# Altium PCB Siwa_PCB.PcbDoc (part 2 of 2)
Units mm, origin at the board's own origin, x right, y up, seen from the top; angles counter-clockwise.
Board outline 100 x 100 mm, 2 copper layers (Top Layer, Bottom Layer), stack 1.569 mm thick; 68 components, 95 nets, 317 pads, 64 vias.
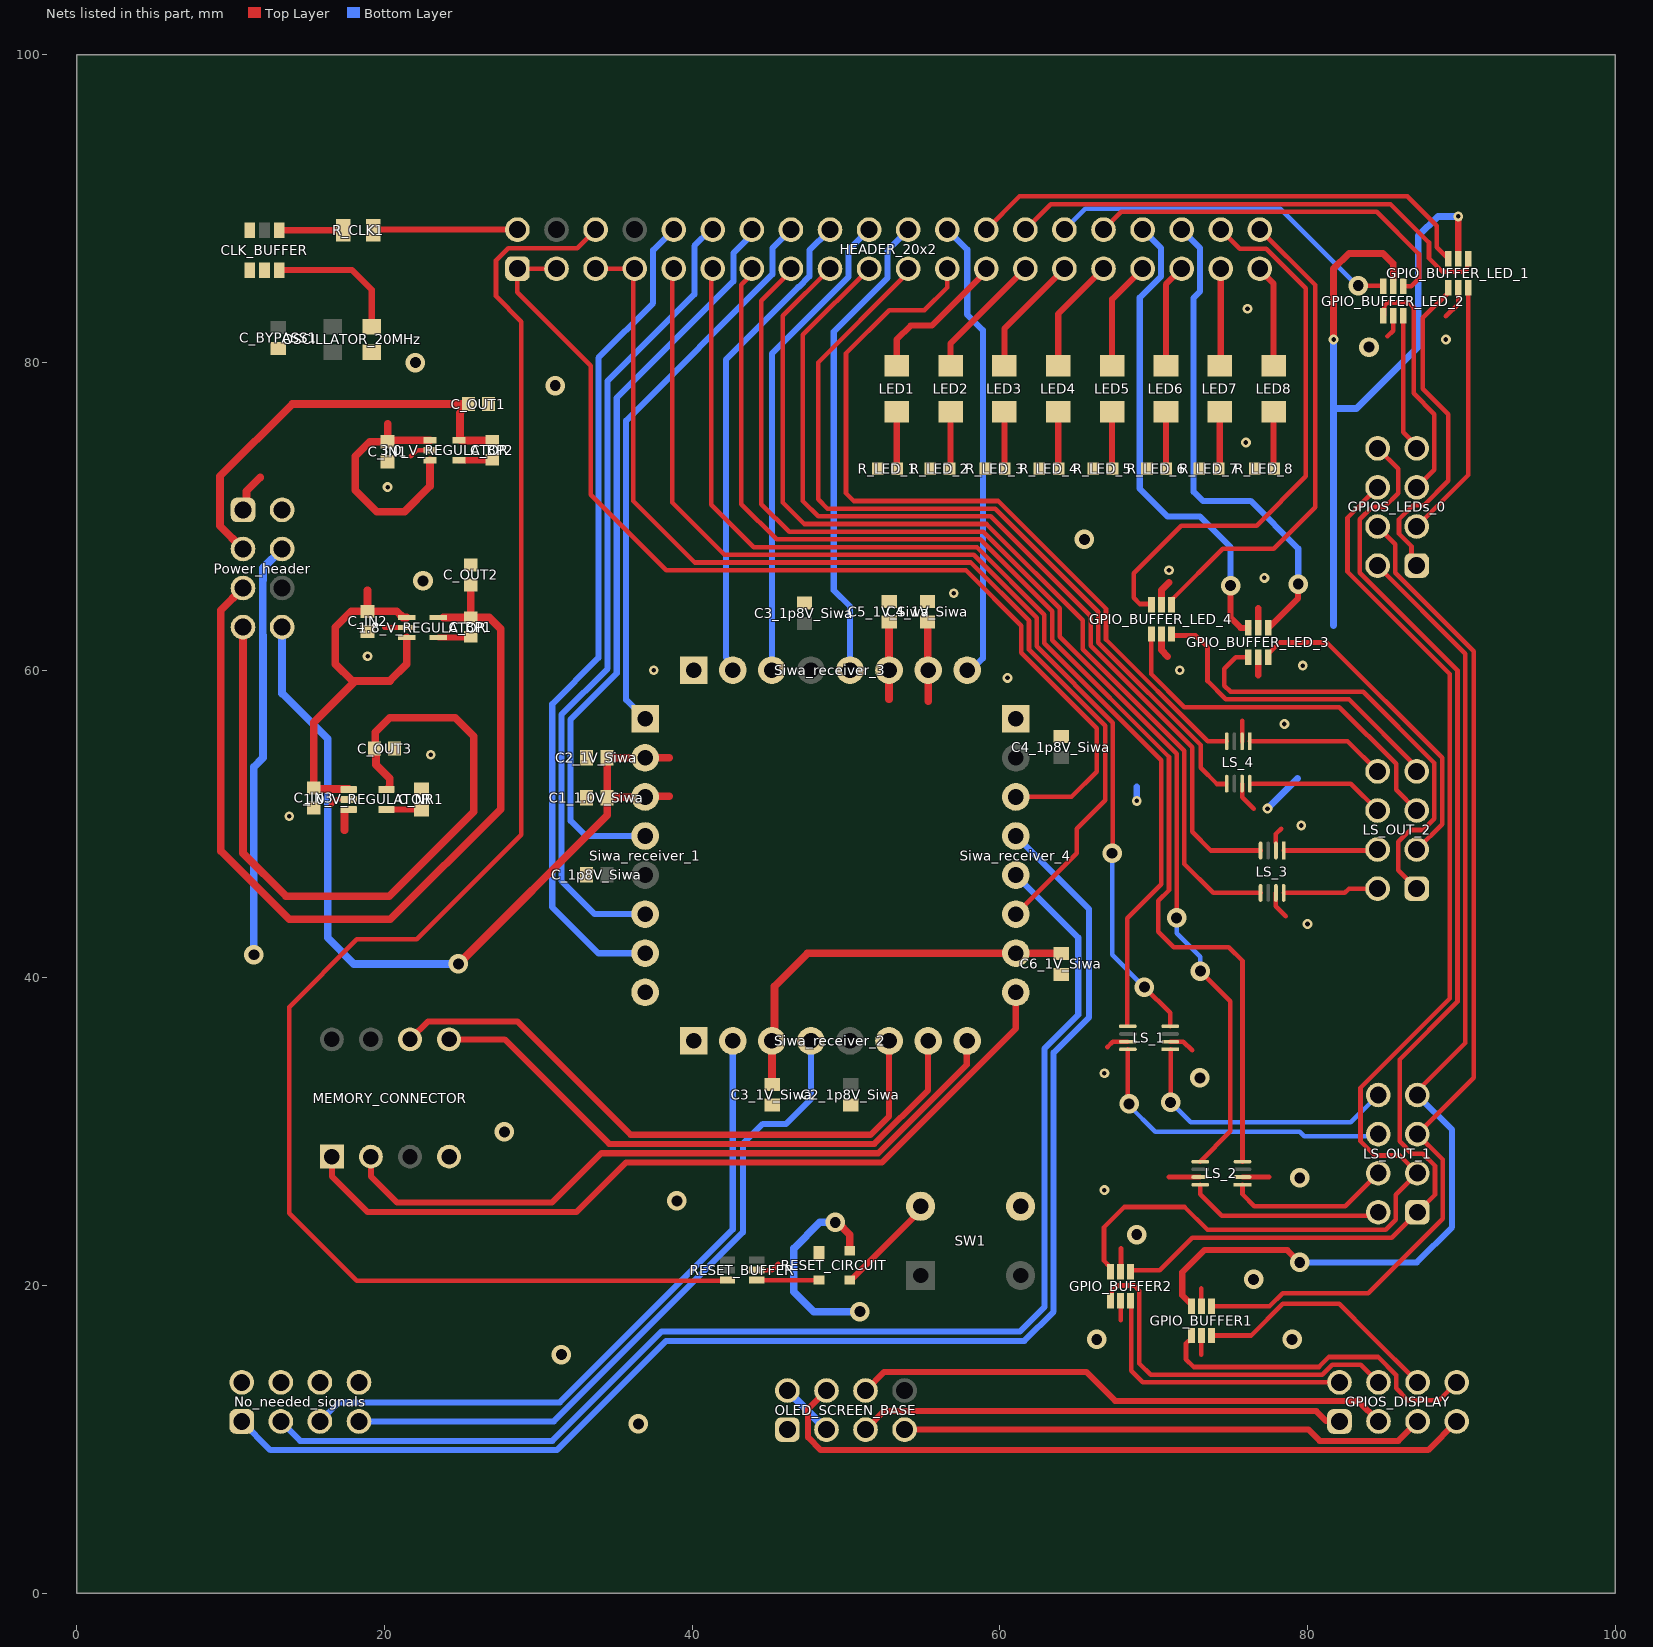
[diagram p2: the nets of this part, all layers, seen from the top]

## Via types
v1: diameter 0.635, hole 0.3, Top Layer to Bottom Layer, 29 vias
v2: diameter 1.27/1.27 (per signal layer), hole 0.711, Top Layer to Bottom Layer, 17 vias
v3: diameter 1.27, hole 0.711, Top Layer to Bottom Layer, 16 vias
v4: diameter 0.635/0.635 (per signal layer), hole 0.3, Top Layer to Bottom Layer, 2 vias

## Nets (pads, with @x,y where several pads share a name; then routed paths per layer and width w, separated by ;. In a path a pad name is that pad's centre, name@x,y a point inside that pad or via, vN(x,y) a via of type N, cw(c..) or ccw(c..) an arc to the next point about the centre after c; other vN are vias at no path point) (continued)
1.8V_regulator: 1.8_V_REGULATOR.5 C_BP1.2 C_OUT2.2 Power_header.5 | length 58.6
  Top Layer w0.5: Power_header.5@10.8,65.34 9.35,63.89 9.35,48.25 13.8,43.8 20.38,43.8 27.55,50.97 27.55,62.675 26.8,63.425 C_BP1.2@25.6,63.425 ; 1.8_V_REGULATOR.5@23.824,63.425 C_BP1.2@25.6,63.425 ; C_OUT2.2@25.6,65.55 C_BP1.2@25.6,63.425
1V: C1_1.0V_Siwa.2 C2_1V_Siwa.2 C3_1V_Siwa.2 C4_1V_Siwa.2 C5_1V_Siwa.2 C6_1V_Siwa.2 Power_header.8 Siwa_receiver_1.2 Siwa_receiver_1.3 Siwa_receiver_2.3 Siwa_receiver_3.6 Siwa_receiver_3.7 Siwa_receiver_4.7 | length 92.3
  Top Layer w0.5: v2(24.8,40.9) 24.807,40.9 34.475,50.568 C1_1.0V_Siwa.2@34.475,51.7 ; 38.5,51.8 36.98,51.8 Siwa_receiver_1.3@36.94,51.76 36.91,51.73 34.505,51.73 C1_1.0V_Siwa.2@34.475,51.7 ; 38.5,54.3 Siwa_receiver_1.2@36.94,54.3 C2_1V_Siwa.2@34.475,54.3 C1_1.0V_Siwa.2@34.475,51.7 ; C3_1V_Siwa.2@45.2,33.075 45.19,33.085 45.19,35.89 Siwa_receiver_2.3@45.18,35.9 45.357,36.077 45.357,39.457 47.5,41.6 Siwa_receiver_4.7@61.04,41.6 61.053,41.588 63.888,41.588 C6_1V_Siwa.2@63.937,41.637 ; 52.8,58.1 Siwa_receiver_3.6@52.8,60 C5_1V_Siwa.2@52.8,63.125 ; C4_1V_Siwa.2@55.3,63.125 55.32,63.105 55.32,60.02 Siwa_receiver_3.7@55.34,60 55.34,58
  Bottom Layer w0.5: Power_header.8@13.34,62.8 13.34,58.49 16.3,55.53 16.3,42.6 18,40.9 v2(24.8,40.9)
1V_regulator: 1.0_V_REGULATOR.5 C_OUT3.2 Power_header.7 | length 49.7
  Top Layer w0.5: Power_header.7@10.8,62.8 10.8,48.1 13.6,45.3 20.3,45.3 25.8,50.8 25.8,55.7 24.6,56.9 20.332,56.9 19.391,55.958 19.391,54.941 C_OUT3.2@19.35,54.9 19.443,54.807 19.443,53.857 20.343,52.957 20.343,52.275 20.318,52.25 1.0_V_REGULATOR.5@20.125,52.25
3V: GPIO_BUFFER1.5 GPIO_BUFFER2.5 GPIO_BUFFER_LED_1.5 GPIO_BUFFER_LED_2.5 GPIO_BUFFER_LED_3.5 GPIO_BUFFER_LED_4.5 LS_1.7 LS_2.7 LS_3.7 LS_4.7 OLED_SCREEN_BASE.2 OLED_SCREEN_BASE.3 Power_header.4 RESET_CIRCUIT.4 | length 109.1
  Top Layer w0.3: 67,35.5 67.35,35.85 LS_1.7@68.324,35.85 ; 67.85,17.75 GPIO_BUFFER2.5@67.85,19 ; 71,27.05 LS_2.7@73.024,27.05 ; 73.1,15.5 GPIO_BUFFER1.5@73.1,16.75 ; LS_4.7@75.75,52.624 75.75,51.75 76.5,51 ; LS_3.7@77.95,45.524 77.95,44.65 78.6,44
  Top Layer w0.45: GPIO_BUFFER_LED_4.5@70.5,64.25 70.5,65.2 71,65.7 ; GPIO_BUFFER_LED_3.5@76.8,62.75 76.8,64 ; v4(81.7,81.5) 81.7,86.1 82.7,87.1 84.9,87.1 85.575,86.425 GPIO_BUFFER_LED_2.5@85.575,85.396 ; GPIO_BUFFER_LED_1.5@89.8,87.2 v1(89.8,89.5)
  Top Layer w0.5: v2(49.3,24.1) 49.45,24.1 50.25,23.3 RESET_CIRCUIT.4@50.25,22.25
  Bottom Layer w0.45: v1@68.9,51.4 v1(68.9,51.5) 68.9,52.4 ; v1(77.4,51) 79.35,52.95 ; 81.7,62.915 81.7,77 ; v4(81.7,81.5) 81.7,77 ; v1(89.8,89.5) 88.474,89.5 87.2,88.226 87.2,81 83.2,77 81.7,77
  Bottom Layer w0.5: v2(11.5,41.5) 11.5,53.7 12.1,54.3 12.1,62.272 12.09,62.282 12.09,65.858 12.1,65.868 12.1,66.64 Power_header.4@13.34,67.88 ; OLED_SCREEN_BASE.2@46.19,13.17 OLED_SCREEN_BASE.3@48.73,10.63 ; v2(49.3,24.1) 48.3,24.1 46.6,22.4 46.6,19.6 47.9,18.3 v2(50.9,18.3)
  other v1: 66.8,26.2 66.8,33.8 80,43.5 77.2,66 71,66.5
  other v3: 66.3,16.5 79,16.5
3V_regulator: 3.0_V_REGULATOR.5 C_BP2.2 C_OUT1.2 Power_header.3 | length 27.9
  Top Layer w0.5: Power_header.3@10.8,67.88 9.3,69.38 9.3,72.6 14,77.3 C_OUT1.2@25.4,77.3 ; 3.0_V_REGULATOR.5@24.9,75 24.9,76.725 25.45,77.275 C_OUT1.2@25.45,77.3 ; 3.0_V_REGULATOR.5@25.025,74.938 26.987,74.938 C_BP2.2@27,74.925
5V_input: 1.0_V_REGULATOR.1 1.0_V_REGULATOR.3 1.8_V_REGULATOR.1 1.8_V_REGULATOR.3 3.0_V_REGULATOR.1 3.0_V_REGULATOR.3 C_IN1.2 C_IN2.2 C_IN3.2 Power_header.1 | length 46.8
  Top Layer w0.5: Power_header.1@10.8,70.42 11.023,70.643 11.023,71.623 11.93,72.53 ; C_IN3.2@15.307,52.257 C_IN3.2@15.4,52.35 ; 17.4,49.6 1.0_V_REGULATOR.3@17.4,50.8 ; 1.0_V_REGULATOR.1@17.675,52.275 15.475,52.275 C_IN3.2@15.4,52.35 ; 18,59.2 15.4,56.6 C_IN3.2@15.4,52.35 ; 18.898,65.2 C_IN2.2@18.898,63.826 ; 20.2,76.025 C_IN1.2@20.2,74.85 19.05,74.85 18.1,73.9 18.1,71.7 19.5,70.3 21.3,70.3 22.95,71.95 3.0_V_REGULATOR.3@22.95,73.65 ; C_IN1.2@20.3,74.95 3.0_V_REGULATOR.1@22.95,74.95 ; 1.8_V_REGULATOR.3@21.449,62.122 21.449,60.4 20.349,59.3 17.9,59.3 16.8,60.4 16.8,62.8 17.826,63.826 C_IN2.2@18.898,63.826 ; 1.8_V_REGULATOR.1@21.449,63.422 21.199,63.422 20.795,63.826 C_IN2.2@18.898,63.826
GND: 1.0_V_REGULATOR.2 1.8_V_REGULATOR.2 3.0_V_REGULATOR.2 C1_1.0V_Siwa.1 C2_1p8V_Siwa.1 C2_1V_Siwa.1 C3_1p8V_Siwa.1 C3_1V_Siwa.1 C4_1p8V_Siwa.2 C4_1V_Siwa.1 C5_1V_Siwa.1 C6_1V_Siwa.1 C_1p8V_Siwa.1 C_BYPASS1.1 C_IN1.1 C_IN2.1 C_IN3.1 C_NR1.1 C_OUT1.1 C_OUT2.1 C_OUT3.1 CLK_BUFFER.1 CLK_BUFFER.2 CLK_BUFFER.6 GPIO_BUFFER1.2 GPIO_BUFFER2.2 GPIO_BUFFER_LED_1.2 GPIO_BUFFER_LED_2.2 GPIO_BUFFER_LED_3.2 GPIO_BUFFER_LED_4.2 LS_1.2 LS_2.2 LS_3.2 LS_4.2 MEMORY_CONNECTOR.4 No_needed_signals.2 No_needed_signals.4 No_needed_signals.6 No_needed_signals.8 OLED_SCREEN_BASE.1 OSCILLATOR_20MHz.2 Power_header.2 R_LED_1.2 R_LED_2.2 R_LED_3.2 R_LED_4.2 R_LED_5.2 R_LED_6.2 R_LED_7.2 R_LED_8.2 RESET_BUFFER.2 RESET_CIRCUIT.1 Siwa_receiver_1.8 Siwa_receiver_2.1 Siwa_receiver_3.1 Siwa_receiver_4.1 SW1.4 | length 20.5
  Top Layer w0.3: 16.5,51.2 16.9,51.6 1.0_V_REGULATOR.2@17.675,51.6 ; 20,62.772 1.8_V_REGULATOR.2@21.449,62.772 ; 21.7,73.9 22.1,74.3 3.0_V_REGULATOR.2@22.95,74.3 ; RESET_BUFFER.2@44.2,21 45.2,21 45.6,21.4 ; GPIO_BUFFER2.2@67.875,20.8 67.875,22.4 ; LS_1.2@71.076,35.85 71.932,35.85 72.5,35.3 ; GPIO_BUFFER1.2@73.1,19 73.1,19.8 ; LS_4.2@75.75,55.356 75.75,56.7 ; LS_2.2@75.776,27.05 77.5,27.05 ; LS_3.2@77.95,48.8 77.95,49.35 78.3,49.7 ; 85.2,81.7 85.575,82.075 GPIO_BUFFER_LED_2.2@85.575,83.05 ; 89,83 89.8,83.8 GPIO_BUFFER_LED_1.2@89.8,84.85
  Top Layer w0.45: GPIO_BUFFER_LED_4.2@70.5,62.35 70.5,61.3 70.9,60.9 ; 76.8,59.7 GPIO_BUFFER_LED_3.2@76.8,60.85
  Top Layer w0.5: C_IN2.1@18.826,62.526 C_IN2.1@18.898,62.526
  other v1: 79.6,49.9 13.8,50.5 23,54.5 78.5,56.5 60.5,59.5 37.5,60 71.7,60 79.7,60.3 18.9,60.9 57,65 20.2,71.9 76,74.8 89,81.5 76.1,83.5
  other v3: 36.5,11 31.5,15.5 76.5,20.4 68.9,23.3 39,25.5 79.5,27 27.785,29.985 73,33.5 22.5,65.8 65.5,68.5 31.1,78.5 22,80 84,81
GPIO_LED_0: HEADER_20x2.25 LED1.2 | length 9.8
  Top Layer w0.4: LED1.2@53.3,79.8 53.3,81.5 54.2,82.4 55.578,82.4 59.178,86 59.3,86 59.2,86.1 HEADER_20x2.25@59.12,86.1
GPIO_LED_1: HEADER_20x2.27 LED2.2 | length 8.4
  Top Layer w0.4: LED2.2@56.8,79.8 56.8,81.24 HEADER_20x2.27@61.66,86.1 HEADER_20x2.27@61.66,86.16
GPIO_LED_2: HEADER_20x2.29 LED3.2 | length 7.9
  Top Layer w0.4: LED3.2@60.3,79.8 60.3,82.2 HEADER_20x2.29@64.2,86.1
GPIO_LED_3: HEADER_20x2.31 LED4.2 | length 7.6
  Top Layer w0.4: LED4.2@63.8,79.8 63.8,83.16 66.54,85.9 66.7,85.9 66.74,85.94 HEADER_20x2.31@66.74,86.1
GPIO_LED_4: HEADER_20x2.33 LED5.2 | length 7.3
  Top Layer w0.4: LED5.2@67.3,79.8 67.3,84.12 HEADER_20x2.33@69.28,86.1 HEADER_20x2.33@69.5,86.1
GPIO_LED_5: HEADER_20x2.35 LED6.2 | length 6.9
  Top Layer w0.4: LED6.2@70.8,79.8 70.8,85.08 71.72,86 71.9,86 71.82,86.08 HEADER_20x2.35@71.82,86.1
GPIO_LED_6: HEADER_20x2.37 LED7.2 | length 6.4
  Top Layer w0.4: LED7.2@74.3,79.8 74.36,79.86 74.36,86.04 74.3,86.1 HEADER_20x2.37@74.36,86.1
GPIO_LED_7: HEADER_20x2.39 LED8.2 | length 6.7
  Top Layer w0.4: HEADER_20x2.39@76.9,86.1 76.9,86.02 77.8,85.12 LED8.2@77.8,79.8
GPIO_PAD_0: HEADER_20x2.10 Siwa_receiver_1.7 | length 54.6
  Bottom Layer w0.4: Siwa_receiver_1.7@36.94,41.6 33.9,41.6 30.9,44.6 30.9,57.8 33.9,60.8 33.9,80.3 37.46,83.86 37.46,87.3 HEADER_20x2.10@38.8,88.64
GPIO_PAD_0_OUT: HEADER_20x2.9 LS_1.4 | length 72.2
  Top Layer w0.3: HEADER_20x2.9@38.8,86.1 38.7,86 38.7,70.9 42.1,67.5 58.307,67.5 62.4,63.407 62.4,61.543 67.353,56.59 67.353,48.153 v2(67.3,48.1) ; v2(69.4,39.4) 71.076,37.724 LS_1.4@71.076,36.85
  Bottom Layer w0.3: v2(67.3,48.1) 67.3,41.5 v2(69.4,39.4)
GPIO_PAD_1: HEADER_20x2.12 Siwa_receiver_1.6 | length 52.7
  Bottom Layer w0.4: Siwa_receiver_1.6@36.94,44.14 33.66,44.14 31.5,46.3 31.5,57.1 34.5,60.1 34.5,78.8 40.14,84.44 40.14,87.577 HEADER_20x2.12@41.203,88.64
GPIO_PAD_1_OUT: HEADER_20x2.11 LS_1.5 | length 70.8
  Top Layer w0.3: HEADER_20x2.11@41.34,86.1 41.24,86 41.24,70.76 44,68 58.514,68 62.9,63.614 62.9,61.75 70.5,54.15 70.5,46.076 68.285,43.861 LS_1.5@68.285,36.889
GPIO_PAD_2: HEADER_20x2.14 Siwa_receiver_1.4 | length 48.7
  Top Layer w0.4: HEADER_20x2.14@43.555,88.64 HEADER_20x2.14@43.88,88.64
  Bottom Layer w0.4: Siwa_receiver_1.4@36.94,49.22 33.08,49.22 32.1,50.2 32.1,56.8 35.1,59.8 35.1,77.7 42.68,85.28 42.68,87.115 43.65,88.086 HEADER_20x2.14@43.65,88.545
GPIO_PAD_2_OUT: HEADER_20x2.13 LS_2.4 | length 82.2
  Top Layer w0.3: HEADER_20x2.13@43.88,86.1 43.88,85.748 43.2,85.068 43.2,70.8 45.5,68.5 58.721,68.5 63.4,63.821 63.4,61.957 71,54.357 71,45.7 70.3,45 70.3,43 71.3,42 74.884,42 75.776,41.108 LS_2.4@75.776,28.05
GPIO_PAD_3: HEADER_20x2.16 Siwa_receiver_1.1 | length 36.8
  Bottom Layer w0.4: Siwa_receiver_1.1@36.94,56.84 35.7,58.08 35.7,76.223 45.22,85.743 45.22,87.44 HEADER_20x2.16@46.42,88.64
GPIO_PAD_3_OUT: HEADER_20x2.15 LS_2.5 | length 79.7
  Top Layer w0.3: HEADER_20x2.15@46.42,86.1 46.42,85.924 44.5,84.004 44.5,70.8 46.3,69 58.928,69 63.9,64.028 63.9,62.164 71.5,54.564 v2(71.5,43.9) ; LS_2.5@73.024,28.05 74.991,30.017 74.991,38.48 v2(73.036,40.435)
  Bottom Layer w0.3: v2(71.5,43.9) 71.5,42.9 73.036,41.364 v2(73.036,40.435)
GPIO_PAD_4: HEADER_20x2.18 Siwa_receiver_3.2 | length 32
  Bottom Layer w0.4: Siwa_receiver_3.2@42.64,60 42.64,60.379 42.2,60.819 42.2,80.2 46.9,84.9 46.917,84.9 47.62,85.603 47.62,87.3 48.9,88.58 48.9,88.8 48.96,88.74 HEADER_20x2.18@48.96,88.64
GPIO_PAD_4_OUT: HEADER_20x2.17 LS_3.5 | length 63.4
  Top Layer w0.3: HEADER_20x2.17@48.96,86.1 45.9,83.04 45.9,70.9 47.3,69.5 59.136,69.5 65.4,63.236 65.4,61.372 72,54.772 72,47.4 73.876,45.524 LS_3.5@76.95,45.524
GPIO_PAD_5: HEADER_20x2.20 Siwa_receiver_3.3 | length 31.5
  Bottom Layer w0.4: Siwa_receiver_3.3@45.18,60 45.18,80.58 50.16,85.56 50.16,87.3 51.46,88.6 51.6,88.6 51.56,88.64 HEADER_20x2.20@51.5,88.64
GPIO_PAD_5_OUT: HEADER_20x2.19 LS_3.4 | length 60.4
  Top Layer w0.3: HEADER_20x2.19@51.5,86.1 47.2,81.8 47.2,71 48.2,70 59.4,70 65.9,63.5 65.9,61.579 72.5,54.979 72.5,49.5 73.724,48.276 LS_3.4@76.95,48.276
GPIO_PAD_6: HEADER_20x2.22 Siwa_receiver_3.5 | length 31.2
  Bottom Layer w0.4: Siwa_receiver_3.5@50.26,60 50.26,64.14 49.2,65.2 49.2,82 52.7,85.5 52.7,87.3 HEADER_20x2.22@54.04,88.64 HEADER_20x2.22@54.04,88.74
GPIO_PAD_6_OUT: HEADER_20x2.21 LS_4.5 | length 53.6
  Top Layer w0.3: HEADER_20x2.21@54.04,86.1 54.04,85.848 53.636,85.444 53.636,85.436 48.2,80 48.2,71.1 48.8,70.5 59.693,70.5 66.4,63.793 66.4,61.786 73.05,55.136 73.05,53.668 74.118,52.6 LS_4.5@74.718,52.6
GPIO_PAD_7: HEADER_20x2.24 Siwa_receiver_3.8 | length 30.2
  Bottom Layer w0.4: HEADER_20x2.24@56.58,88.64 57.88,87.34 57.88,83.12 58.9,82.1 58.9,60.77 58.13,60 Siwa_receiver_3.8@57.88,60
GPIO_PAD_7_OUT: HEADER_20x2.23 LS_4.4 | length 51.3
  Top Layer w0.3: HEADER_20x2.23@56.58,86.1 56.58,84.88 55.1,83.4 52.8,83.4 50,80.6 50,71.5 50.5,71 59.9,71 66.9,64 66.9,61.993 73.517,55.376 LS_4.4@74.75,55.376
H_LED_4: GPIO_BUFFER_LED_3.6 HEADER_20x2.34 | length 31.4
  Top Layer w0.4: v2(75,65.5) 75,63.4 75.65,62.75 GPIO_BUFFER_LED_3.6@76.15,62.75
  Bottom Layer w0.4: HEADER_20x2.34@69.28,88.64 70.48,87.44 70.48,85.603 69.1,84.223 69.1,71.8 70.9,70 73,70 75,68 v2(75,65.5)
H_LED_5: GPIO_BUFFER_LED_3.4 HEADER_20x2.36 | length 32
  Top Layer w0.4: GPIO_BUFFER_LED_3.4@77.45,62.75 77.462,62.738 79.389,64.664 79.389,65.589 v2(79.4,65.6)
  Bottom Layer w0.4: HEADER_20x2.36@71.82,88.64 73.02,87.44 73.02,84.62 72.6,84.2 72.6,71.6 73.2,71 76.3,71 79.4,67.9 v2(79.4,65.6)
H_LED_6: GPIO_BUFFER_LED_4.6 HEADER_20x2.38 | length 36.1
  Top Layer w0.3: GPIO_BUFFER_LED_4.6@69.85,64.25 69.8,64.3 69.1,64.3 68.7,64.7 68.7,66.3 71.8,69.4 76.7,69.4 79.9,72.6 79.9,84.826 77.326,87.4 75.6,87.4 HEADER_20x2.38@74.36,88.64
H_LED_7: GPIO_BUFFER_LED_4.4 HEADER_20x2.40 | length 31.7
  Top Layer w0.3: GPIO_BUFFER_LED_4.4@71.15,64.25 71.225,64.325 71.225,64.625 74.5,67.9 77.8,67.9 80.5,70.6 80.5,85.04 HEADER_20x2.40@76.9,88.64
MAIP: No_needed_signals.3 Siwa_receiver_4.5 | length 84.4
  Bottom Layer w0.4: No_needed_signals.3@13.26,11.16 14.52,9.9 30.9,9.9 38,17 61.3,17 62.9,18.6 62.9,35.4 65.1,37.6 65.1,42.62 Siwa_receiver_4.5@61.04,46.68
Net1.0_V_REGULATOR_4: 1.0_V_REGULATOR.4 C_NR1.2 | length 2.2
  Top Layer w0.4: 1.0_V_REGULATOR.4@20.125,50.95 C_NR1.2@22.375,50.95
Net1.8_V_REGULATOR_4: 1.8_V_REGULATOR.4 C_BP1.1 | length 2.1
  Top Layer w0.4: 1.8_V_REGULATOR.4@23.499,62.122 25.547,62.122 C_BP1.1@25.6,62.175
Net3.0_V_REGULATOR_4: 3.0_V_REGULATOR.4 C_BP2.1 | length 2.1
  Top Layer w0.4: 3.0_V_REGULATOR.4@24.85,73.65 C_BP2.1@26.975,73.65
NetCLK_BUFFER_3: CLK_BUFFER.3 OSCILLATOR_20MHz.3 | length 9
  Top Layer w0.4: CLK_BUFFER.3@13.15,86.005 17.895,86.005 19.17,84.73 OSCILLATOR_20MHz.3@19.17,82.325
NetCLK_BUFFER_4: CLK_BUFFER.4 R_CLK1.1 | length 4.2
  Top Layer w0.4: CLK_BUFFER.4@13.155,88.6 R_CLK1.1@17.325,88.6
NetGPIO_BUFFER1_1: GPIO_BUFFER1.1 GPIOS_LEDs_0.4 LS_OUT_1.5 | length 67.2
  Top Layer w0.3: GPIO_BUFFER1.1@73.75,18.65 77.533,18.65 78.383,19.5 83.951,19.5 88.79,24.339 88.79,28.19 LS_OUT_1.5@87.14,29.84 90.8,33.5 90.8,61.239 85.71,66.329 85.71,68.19 GPIOS_LEDs_0.4@84.56,69.34
NetGPIO_BUFFER1_3: GPIO_BUFFER1.3 GPIOS_LEDs_0.2 LS_OUT_1.7 | length 69.5
  Top Layer w0.3: GPIOS_LEDs_0.2@84.56,66.8 84.56,66.772 90.265,61.067 90.265,35.765 87.14,32.64 LS_OUT_1.7@87.14,32.38
  Top Layer w0.4: GPIO_BUFFER1.3@72.45,18.65 72.45,18.772 71.863,19.359 71.863,20.863 73.3,22.3 78.7,22.3 v2(79.5,21.5)
  Bottom Layer w0.4: v2(79.5,21.5) 87.1,21.5 89.4,23.8 89.4,30.12 LS_OUT_1.7@87.14,32.38
NetGPIO_BUFFER1_4: GPIO_BUFFER1.4 GPIOS_DISPLAY.8 | length 22
  Top Layer w0.3: GPIO_BUFFER1.4@72.45,16.75 72.45,16.475 72.375,16.4 72.276,16.4 72.1,16.224 72.1,15.2 72.6,14.7 80.747,14.7 81.397,15.35 84.596,15.35 85.77,14.176 85.77,13.316 86.536,12.55 88.55,12.55 GPIOS_DISPLAY.8@89.7,13.7
NetGPIO_BUFFER1_6: GPIO_BUFFER1.6 GPIOS_DISPLAY.6 | length 16.4
  Top Layer w0.3: GPIO_BUFFER1.6@73.75,16.75 76.34,16.75 78.39,18.8 82.06,18.8 84.11,16.75 GPIOS_DISPLAY.6@87.16,13.7
NetGPIO_BUFFER2_1: GPIO_BUFFER2.1 GPIOS_LEDs_0.8 LS_OUT_1.1 | length 77.9
  Top Layer w0.3: GPIO_BUFFER2.1@68.575,20.9 68.675,21 70.4,21 72.5,23.1 85.48,23.1 LS_OUT_1.1@87.14,24.76 88.29,25.91 88.29,27.776 87.496,28.57 86.784,28.57 85.99,29.364 85.99,34.689 89.75,38.449 89.75,59.984 83.41,66.324 83.41,69.816 84.202,70.608 85.008,70.608 85.894,71.494 85.894,73.086 GPIOS_LEDs_0.8@84.6,74.38
NetGPIO_BUFFER2_3: GPIO_BUFFER2.3 GPIOS_LEDs_0.6 LS_OUT_1.3 | length 80.1
  Top Layer w0.3: GPIO_BUFFER2.3@67.2,20.9 67.125,20.975 67.125,21.25 66.775,21.6 66.775,23.775 68.1,25.1 72.008,25.1 73.498,23.61 85.076,23.61 85.75,24.284 85.75,25.91 LS_OUT_1.3@87.14,27.3 85.99,28.45 84.364,28.45 83.45,29.364 83.45,32.856 89.25,38.656 89.25,59.75 82.6,66.4 82.6,69.92 GPIOS_LEDs_0.6@84.56,71.88
NetGPIO_BUFFER2_4: GPIO_BUFFER2.4 GPIOS_DISPLAY.4 | length 24.1
  Top Layer w0.3: GPIO_BUFFER2.4@67.2,19 67.275,19.075 67.275,19.645 67.63,20 68.72,20 69.075,19.645 69.075,14.925 69.8,14.2 80.954,14.2 81.604,14.85 83.47,14.85 GPIOS_DISPLAY.4@84.62,13.7
NetGPIO_BUFFER2_6: GPIO_BUFFER2.6 GPIOS_DISPLAY.2 | length 18
  Top Layer w0.3: GPIO_BUFFER2.6@68.55,18.6 68.55,14.45 69.3,13.7 GPIOS_DISPLAY.2@82.08,13.7
NetGPIO_BUFFER_LED_1_1: GPIO_BUFFER_LED_1.1 GPIOS_LEDs_0.1 | length 21.6
  Top Layer w0.3: GPIOS_LEDs_0.1@87.1,66.8 86.764,67.136 86.764,68.05 85.95,68.864 85.95,69.816 86.864,70.73 87.576,70.73 89.15,72.304 89.15,76.65 87.5,78.3 87.5,82.9 89.075,84.475 89.075,84.775 GPIO_BUFFER_LED_1.1@89.15,84.85
NetGPIO_BUFFER_LED_1_3: GPIO_BUFFER_LED_1.3 GPIOS_LEDs_0.3 | length 16.9
  Top Layer w0.3: GPIOS_LEDs_0.3@87.1,69.34 90.45,72.69 GPIO_BUFFER_LED_1.3@90.45,84.85
NetGPIO_BUFFER_LED_1_4: GPIO_BUFFER_LED_1.4 HEADER_20x2.28 | length 32.6
  Top Layer w0.3: HEADER_20x2.28@61.66,88.64 63.32,90.3 85.4,90.3 87.9,87.8 87.9,86.78 88.78,85.9 90.17,85.9 90.375,86.105 90.375,86.675 GPIO_BUFFER_LED_1.4@90.45,86.75
NetGPIO_BUFFER_LED_1_6: GPIO_BUFFER_LED_1.6 HEADER_20x2.26 | length 33.4
  Top Layer w0.3: HEADER_20x2.26@59.12,88.64 61.28,90.8 86.5,90.8 88.4,88.9 88.4,87.5 GPIO_BUFFER_LED_1.6@89.15,86.75
NetGPIO_BUFFER_LED_2_1: GPIO_BUFFER_LED_2.1 GPIOS_LEDs_0.5 | length 15.5
  Top Layer w0.3: GPIO_BUFFER_LED_2.1@84.925,83.05 85,83.125 85,83.695 85.205,83.9 86.595,83.9 86.9,83.595 86.9,78 88.25,76.65 88.25,73.03 GPIOS_LEDs_0.5@87.1,71.88
NetGPIO_BUFFER_LED_2_3: GPIO_BUFFER_LED_2.3 GPIOS_LEDs_0.7 | length 9
  Top Layer w0.3: GPIO_BUFFER_LED_2.3@86.225,83.05 86.225,75.463 87.1,74.588 GPIOS_LEDs_0.7@87.1,74.42
NetGPIO_BUFFER_LED_2_4: GPIO_BUFFER_LED_2.4 HEADER_20x2.32 | length 25
  Top Layer w0.3: HEADER_20x2.32@66.74,88.64 67.9,89.8 84.5,89.8 87.247,87.053 87.247,85.447 86.75,84.95 GPIO_BUFFER_LED_2.4@86.225,84.95
NetGPIO_BUFFER_LED_2_6: GPIO_BUFFER_LED_2.6 HEADER_20x2.30 | length 23.3
  Top Layer w0.3: v2(83.3,85) GPIO_BUFFER_LED_2.6@84.875,85
  Bottom Layer w0.3: HEADER_20x2.30@64.2,88.64 65.56,90 78.238,90 83.238,85 v2(83.3,85)
NetGPIO_BUFFER_LED_3_1: GPIO_BUFFER_LED_3.1 LS_OUT_2.1 | length 28.8
  Top Layer w0.3: GPIO_BUFFER_LED_3.1@76.15,60.85 75.35,60.85 74.6,60.1 74.6,59 75,58.6 83.617,58.6 88.25,53.967 88.25,50.333 87.527,49.61 86.673,49.61 85.9,48.837 85.9,47 LS_OUT_2.1@87.1,45.8
NetGPIO_BUFFER_LED_3_3: GPIO_BUFFER_LED_3.3 LS_OUT_2.3 | length 21.2
  Top Layer w0.3: GPIO_BUFFER_LED_3.3@77.55,61.15 78.2,61.8 81.266,61.8 88.75,54.316 88.75,49.984 87.106,48.34 LS_OUT_2.3@87.1,48.34
NetGPIO_BUFFER_LED_4_1: GPIO_BUFFER_LED_4.1 LS_OUT_2.5 | length 24.5
  Top Layer w0.3: GPIO_BUFFER_LED_4.1@69.85,62.35 69.85,59.75 72,57.6 82.077,57.6 85.76,53.917 85.76,52.22 LS_OUT_2.5@87.1,50.88
NetGPIO_BUFFER_LED_4_3: GPIO_BUFFER_LED_4.3 LS_OUT_2.7 | length 21.1
  Top Layer w0.3: GPIO_BUFFER_LED_4.3@71.15,62.35 71.15,62.326 71.225,62.251 72.749,62.251 73.5,61.5 73.5,59.3 74.7,58.1 82.7,58.1 87.1,53.7 LS_OUT_2.7@87.1,53.42
NetGPIOS_DISPLAY_1: GPIOS_DISPLAY.1 OLED_SCREEN_BASE.5 | length 31.6
  Top Layer w0.4: OLED_SCREEN_BASE.5@51.27,10.63 52.47,11.83 80.57,11.83 81.2,11.2 82.04,11.2 GPIOS_DISPLAY.1@82.08,11.16
NetGPIOS_DISPLAY_3: GPIOS_DISPLAY.3 OLED_SCREEN_BASE.6 | length 35.2
  Top Layer w0.4: OLED_SCREEN_BASE.6@51.27,13.17 52.475,14.375 65.625,14.375 67.5,12.5 83.28,12.5 GPIOS_DISPLAY.3@84.62,11.16
NetGPIOS_DISPLAY_5: GPIOS_DISPLAY.5 OLED_SCREEN_BASE.7 | length 34.2
  Top Layer w0.4: OLED_SCREEN_BASE.7@53.81,10.63 80.07,10.63 80.8,9.9 85.9,9.9 GPIOS_DISPLAY.5@87.16,11.16
NetGPIOS_DISPLAY_7: GPIOS_DISPLAY.7 OLED_SCREEN_BASE.4 | length 46.8
  Top Layer w0.4: OLED_SCREEN_BASE.4@48.73,13.17 47.53,11.97 47.53,10.133 48.363,9.3 87.84,9.3 GPIOS_DISPLAY.7@89.7,11.16
NetHEADER_20x2_1: HEADER_20x2.1 HEADER_20x2.3 Siwa_receiver_4.3 | length 68.2
  Top Layer w0.3: HEADER_20x2.3@31.18,86.1 HEADER_20x2.1@28.64,86.1 28.64,84.56 33.4,79.8 33.4,71.405 38.305,66.5 57.8,66.5 61.4,62.9 61.4,61.129 66.3,56.229 66.3,53.4 64.66,51.76 Siwa_receiver_4.3@61.04,51.76
NetHEADER_20x2_2: HEADER_20x2.2 R_CLK1.2 | length 9.4
  Top Layer w0.4: R_CLK1.2@19.275,88.64 HEADER_20x2.2@28.64,88.64
NetHEADER_20x2_5: HEADER_20x2.5 HEADER_20x2.7 Siwa_receiver_4.6 | length 70.2
  Top Layer w0.3: HEADER_20x2.5@33.72,86.1 HEADER_20x2.7@36.26,86.1 36.16,86 36.16,71 40.16,67 58.1,67 61.9,63.2 61.9,61.336 66.853,56.383 66.853,51.553 65,49.7 65,48.1 Siwa_receiver_4.6@61.04,44.14
NetHEADER_20x2_6: HEADER_20x2.6 RESET_BUFFER.6 | length 108.8
  Top Layer w0.3: HEADER_20x2.6@33.72,88.64 32.52,87.44 28.049,87.44 27.25,86.641 27.25,84.308 28.9,82.658 28.9,49.3 22.1,42.5 18.2,42.5 13.8,38.1 13.8,24.7 18.2,20.3 42.25,20.3 RESET_BUFFER.6@42.3,20.35
NetLED1_1: LED1.1 R_LED_1.1 | length 3.7
  Top Layer w0.4: LED1.1@53.3,76.8 53.3,73.127 R_LED_1.1@53.327,73.1
NetLED2_1: LED2.1 R_LED_2.1 | length 3.6
  Top Layer w0.4: R_LED_2.1@56.727,73.1 56.8,73.173 LED2.1@56.8,76.7
NetLED3_1: LED3.1 R_LED_3.1 | length 3.7
  Top Layer w0.4: LED3.1@60.3,76.8 60.3,73.127 R_LED_3.1@60.327,73.1
NetLED4_1: LED4.1 R_LED_4.1 | length 3.7
  Top Layer w0.4: LED4.1@63.8,76.8 63.8,73.127 R_LED_4.1@63.827,73.1
NetLED5_1: LED5.1 R_LED_5.1 | length 3.7
  Top Layer w0.4: LED5.1@67.3,76.8 67.3,73.127 R_LED_5.1@67.327,73.1
NetLED6_1: LED6.1 R_LED_6.1 | length 3.7
  Top Layer w0.4: LED6.1@70.8,76.8 70.8,73.127 R_LED_6.1@70.827,73.1
NetLED7_1: LED7.1 R_LED_7.1 | length 3.7
  Top Layer w0.4: R_LED_7.1@74.227,73.1 74.3,73.173 LED7.1@74.3,76.8
NetLED8_1: LED8.1 R_LED_8.1 | length 3.7
  Top Layer w0.4: LED8.1@77.8,76.8 77.8,73.127 R_LED_8.1@77.827,73.1
NetLS_1_1: LS_1.1 LS_OUT_1.8 | length 18.2
  Top Layer w0.3: v2(71.1,31.9) LS_1.1@71.1,35.35
  Bottom Layer w0.3: v2(71.1,31.9) 72.4,30.6 82.82,30.6 LS_OUT_1.8@84.6,32.38
NetLS_1_8: LS_1.8 LS_OUT_1.6 | length 20.8
  Top Layer w0.3: LS_1.8@68.324,35.35 68.324,31.876 v2(68.4,31.8)
  Bottom Layer w0.3: v2(68.4,31.8) 68.4,31.7 70.1,30 79.5,30 79.79,29.71 84.47,29.71 LS_OUT_1.6@84.6,29.84
NetLS_2_1: LS_2.1 LS_OUT_1.4 | length 10.7
  Top Layer w0.3: LS_2.1@75.776,26.55 75.776,25.918 76.544,25.15 81.304,25.15 82.45,25.15 LS_OUT_1.4@84.6,27.3
NetLS_2_8: LS_2.8 LS_OUT_1.2 | length 12.9
  Top Layer w0.3: LS_2.8@73.024,26.55 73.024,25.918 74.418,24.524 84.364,24.524 LS_OUT_1.2@84.6,24.76
NetLS_3_1: LS_3.1 LS_OUT_2.4 | length 6.1
  Top Layer w0.3: LS_3.1@78.45,48.276 84.496,48.276 LS_OUT_2.4@84.56,48.34
NetLS_3_8: LS_3.8 LS_OUT_2.2 | length 6.2
  Top Layer w0.3: LS_3.8@78.45,45.524 82.424,45.524 82.7,45.8 LS_OUT_2.2@84.56,45.8
NetLS_4_1: LS_4.1 LS_OUT_2.8 | length 9.1
  Top Layer w0.3: LS_4.1@76.25,55.376 82.604,55.376 LS_OUT_2.8@84.56,53.42
NetLS_4_8: LS_4.8 LS_OUT_2.6 | length 9
  Top Layer w0.3: LS_4.8@76.282,52.624 82.816,52.624 LS_OUT_2.6@84.56,50.88
NetMEMORY_CONNECTOR_1: MEMORY_CONNECTOR.1 Siwa_receiver_4.8 | length 54
  Top Layer w0.4: MEMORY_CONNECTOR.1@16.575,28.375 16.575,27.095 18.885,24.785 32.485,24.785 35.7,28 52.346,28 61.04,36.694 Siwa_receiver_4.8@61.04,39.06
NetMEMORY_CONNECTOR_2: MEMORY_CONNECTOR.2 Siwa_receiver_2.8 | length 46
  Top Layer w0.4: MEMORY_CONNECTOR.2@19.115,28.375 19.115,27.085 20.815,25.385 30.885,25.385 34.1,28.6 52.097,28.6 57.849,34.351 57.849,35.869 Siwa_receiver_2.8@57.88,35.9
NetMEMORY_CONNECTOR_5: MEMORY_CONNECTOR.5 Siwa_receiver_2.7 | length 38.6
  Top Layer w0.4: MEMORY_CONNECTOR.5@24.195,35.995 27.805,35.995 34.6,29.2 51.849,29.2 55.34,32.691 Siwa_receiver_2.7@55.34,35.9
NetMEMORY_CONNECTOR_6: MEMORY_CONNECTOR.6 Siwa_receiver_2.6 | length 40.1
  Top Layer w0.4: MEMORY_CONNECTOR.6@21.655,35.995 22.83,37.17 28.63,37.17 32.679,33.121 36,29.8 51.6,29.8 52.8,31 Siwa_receiver_2.6@52.8,35.9
NetRESET_BUFFER_1: RESET_BUFFER.1 RESET_CIRCUIT.2 | length 4
  Top Layer w0.3: RESET_BUFFER.1@44.2,20.35 RESET_CIRCUIT.2@48.25,20.35
NetRESET_CIRCUIT_3: RESET_CIRCUIT.3 SW1.2 | length 6.7
  Top Layer w0.4: RESET_CIRCUIT.3@50.3,20.35 54.85,24.9 SW1.2@54.85,25.15
POC_CONTROL: No_needed_signals.1 Siwa_receiver_4.4 | length 91.1
  Bottom Layer w0.4: No_needed_signals.1@10.72,11.16 12.58,9.3 31.2,9.3 38.3,16.4 61.6,16.4 63.5,18.3 63.5,35.135 65.8,37.435 65.8,44.46 Siwa_receiver_4.4@61.04,49.22
UART_RX: No_needed_signals.7 Siwa_receiver_2.4 | length 45.2
  Bottom Layer w0.4: No_needed_signals.7@18.34,11.16 31.009,11.16 43.3,23.451 43.3,29.2 44.6,30.5 46.1,30.5 47.72,32.12 Siwa_receiver_2.4@47.72,35.9
UART_TX: No_needed_signals.5 Siwa_receiver_2.2 | length 44.3
  Bottom Layer w0.4: No_needed_signals.5@15.8,11.16 17.04,12.4 31.4,12.4 42.64,23.64 Siwa_receiver_2.2@42.64,35.9
pads on no net: HEADER_20x2.4 HEADER_20x2.8 OLED_SCREEN_BASE.8 RESET_BUFFER.3 RESET_BUFFER.4 SW1.1 SW1.3

## Polygon pours and split planes (outlines as drawn)
1V on Top Layer "1V_L01_P000" (solid, pour order 0): 34.1,55.5 33.9,55.3 33.9,50.7 34.1,50.5 42.4,50.5 43.9,49 43.9,32.6 46.4,32.6 46.4,39.3 47.5,40.4 62.3,40.4 62.9,40.9 64.8,40.9 64.8,42.6 64.6,42.8 57.2,42.8 52,48 52,50.5 56.5,55 56.5,55.8 56.505,55.805 56.505,63.495 56.4,63.6 51.696,63.601 51.6,63.505 51.6,53.8 50.8,53 40.9,53 38.4,55.5
5V_input on Top Layer "5V_INPUT_L01_P001" (solid, pour order 1): 18.4,73.6 18.4,71.7 19.6,70.5 21.1,70.5 22.6,72 22.6,73.6 23.5,73.6 23.5,71.3 20,67.8 20,65.5 20.5,65 21,64.5 21,64 20.5,63.5 18,63.5 17.2,62.7 17.2,60.5 18.2,59.5 20,59.5 21.1,60.6 21.1,62.1 21.9,62.1 21.9,59.7 20.8,58.6 18.4,58.6 15.794,55.994 15.794,54 15.8,54 17.9,51.9 12.9,51.9 12.5,51.5 12.5,49.7 13.1,49.1 16.5,49.1 17,49.6 17,51 18,51 18,49 17,48 12.5,48 11.5,49 11.5,52.077 14.8,55.377 14.8,56.4 16.3,57.9 16.3,63.3 18.5,65.5 18.5,68.5 14.6,72.4 12.5,72.4 12,71.9 12,69 9.5,69 9.5,71 15.2,76.7 22,76.7 22.5,76.2 22.5,74.5 19.3,74.5
3V on Top Layer "3V_L01_P004" (solid, pour order 4): 91,88 91,90.5 90.5,91 87,91 89,87.5 90.5,87.5
3V on Top Layer "3V_L01_P007" (solid, pour order 7): 66.4,27.5 69,27.5 71,27.5 72,27 72,26 71.5,25.5 68,25.5 66.5,24 66.5,20 67,19.5 68.5,19.5 69,19 69,17.5 66.5,15 49,15 48,14 48,13 47,12 39,12 33.5,17.5 14.5,17.5 10,22 10,42.5 11,43.5 12,43.5 13,42.5 13,23 16.5,19.5 34.5,19.5 39.5,14.5 45,14.5 50.5,20 51.5,20 52.5,19 52.5,17.5 53.5,16.6 63,16.5 64.9,18.4 64.9,26
3V on Top Layer "3V_L01_P008" (solid, pour order 8): 75.615,63.65 77.51,63.65 78.698,64.838 78.8,64.94 78.8,66.9 77.8,67.4 76,67.4 75.5,66.9
3V on Top Layer "3V_L01_P010" (solid, pour order 10): 76.1,49.5 77.2,49.5 79,51.3 79,51.8 78.2,52.6 76.6,52.6 76.1,52.1
1.8V on Top Layer "1.8V_L01_P012" (solid, pour order 12): 76,28.5 77,27.5 77.5,27.5 78.5,28.5 78.5,42.5 78,43.5 77.5,44.5 71.6,47 71.5,42.5 76,41
3V on Top Layer "3V_L01_P015" (solid, pour order 15): 78.5,42.5 77.5,44.5 77.45,45.524 81.5,45.5 82.5,44.5 82.5,42.5 81.5,41.5 79,41.5
1.8V on Top Layer "1.8V_L01_P016" (solid, pour order 16): 72.5,27 72,27 71.5,27.5 71,27.5 69,27.5 61,27.5 60,28.5 60,30 60.5,30.5 69.5,30.5 70.5,29.5 72,29.5 72.5,29
3V on Top Layer "3V_L01_P019" (solid, pour order 19): 67.5,57 70.5,54.5 70.5,46.076 68.285,43.861 68.285,31.015 68.3,31 65.9,31 65.9,45.5 67.451,47.051
1.8V on Top Layer "1.8V_L01_P021" (solid, pour order 21): 59,53.5 59,54.8 59.5,55.3 62,55.3 62.3,55 66,55 66,53.5 64.5,52 63,52 62,53.1 59.5,53.1
1.8V on Top Layer "1.8V_L01_P023" (solid, pour order 23): 41,21 43.5,23.5 46,23.5 46.5,24 46.5,25.5 46,26 42.5,26 40,23.5 37,23.5 36.5,23 36.5,21.5 37,21
1.8V on Top Layer "1.8V_L01_P024" (solid, pour order 24): 49.1,32.6 49.6,32.1 51,32.1 51.5,32.6 51.5,37.5 51,38 49.6,38 49.1,37.5
1.8V on Top Layer "1.8V_L01_P026" (solid, pour order 26): 75.7,51.7 75.7,49.2 75.2,48.7 74.2,48.7 73.7,49.2 73.7,52.2 74.2,52.7 75.2,52.7
1.8V on Top Layer "1.8V_L01_P027" (solid, pour order 27): 72,36.5 72.5,36 74,36 74.5,36.5 74.5,39 70,44.5 68,41 72,37.5
3V on Top Layer "3V_L01_P028" (solid, pour order 28): 72.5,18 72,17.5 72,15.5 72.5,15 80.5,15 81.5,16 81.5,17.5 81,18
1.8V on Top Layer "1.8V_L01_P029" (solid, pour order 29): 20.685,36.985 19.685,37.985 16.185,37.985 15.185,36.985 15.185,33.485 16.185,32.485 18.685,32.485 19.685,31.485 19.685,27.485 20.685,26.485 22.185,26.485 23.185,27.485 23.185,31.485 20.685,34.485
GND on Top Layer "GND_L01_P030" (solid, pour order 30): 0,100 100,100 100,0 0,0
3V on Bottom Layer "3V_L02_P003" (solid, pour order 3): 73.5,70 75.5,68 75.5,65 75,64.5 74.5,64.5 71.5,67.5 70.8,67.5 70,66.7 70,66 73,63 77,63 79,63 80.5,61.5 80.5,56 79,54.5 70,54.5 67.9,52.4 67.9,51.1 68.5,50.5 69.505,50.505 70,51 70,52.5 71,53.5 78,53.5 78.5,53 78.5,52.2 78.7,52 79.5,52 81,50.5 81,45.8 79.1,43.9 79.1,43.04 79.65,42.6 80.4,42.6 82.5,44.7 82.5,50.7 81.7,51.5 81.7,62.3 82.207,62.807 82.2,75.2 86.7,79.7 86.7,79.9 86.7,80.5 85.9,80.5 83.4,78 82.9,78 82.4,78.5 82.4,80.5 81.9,81 81.5,81 81,80.5 81,65.8 79.9,64.7 79.3,64.7 79,65 79,68 76.5,70.5 74,70.5
1.8V on Bottom Layer "1.8V_L02_P006" (solid, pour order 6): 20.4,30.5 22.9,30.5 23.4,30 23.4,24 23.9,23.5 39,23.5 39.5,23 39.5,21.5 39,21 20.9,21 19.9,22 19.9,30
3V on Bottom Layer "3V_L02_P009" (solid, pour order 9): 65.9,34.5 66.4,35 67.5,35 68,34.5 68,25.5 67.5,25 66.4,25 65.9,25.5
1.8V on Bottom Layer "1.8V_L02_P011" (solid, pour order 11): 51.4,31 51.9,30.5 61.5,30.5 62,30 62,28.5 61.5,28 50.1,28 45.6,23.5 44.4,23.5 43.9,24 43.9,25.4 49.1,30.6 49.1,35.5 51.4,35.5
1.8V on Bottom Layer "1.8V_L02_P014" (solid, pour order 14): 75.2,43 74.2,43 73.7,43.5 73.7,50.5 74.2,51 75.2,51 75.7,50.5 75.7,43.5
1.8V on Bottom Layer "1.8V_L02_P017" (solid, pour order 17): 76.507,34.993 76.5,33.5 77,33 78,33 78.5,33.5 78.5,36.5 77,38 72.5,38 72,37.5 72,36.5 72.5,36 75.5,36
3V on Bottom Layer "3V_L02_P020" (solid, pour order 20): 80,15 81,16 81,17 80,18 72.5,18 65.5,18 65,17.5 65,15.5 65.5,15
GND on Bottom Layer "GND_L02_P022" (solid, pour order 22): 0,100 0,0 100,0 100,100
3V on Bottom Layer "3V_L02_P025" (solid, pour order 25): 52,15.5 52,10 51,9.1 47.5,9 43,9 42,10 42,12 29,13.8 30.6,15.7 38.1,15.9 42.45,17.65 48.3,17 51,16.7

## Other copper
Top Layer:
  region net GND: 74.241,55.937 74.241,56.341 74.3,56.4 76.724,56.4 76.768,56.356 76.768,55.937 82.523,55.937 82.655,56.229 81.844,57.04 73.038,57.04 72.923,56.763 73.749,55.937
  region net 1.8V: 11.7,79 13.5,79 13.5,78.3 11.6,78.3 9,80.9 9,84.5 9.5,85 9.5,83.1 10,82.6 12.7,82.6 12.7,82.1 11,82.1 10.2,81.3 10.2,80.5
  region net 1.8V: 31.5,64.5 32.5,63.5 47.9,63.5 48.9,62.5 48.9,58 50.6,56.3 50.6,55.433 50.03,54.8 49.2,54.8 46.5,57.5 46.5,61 46,61.5 31.5,61.5 29.5,63.5 29.5,66.5 30,67 31,67 31.5,66.5
  region net 3V: 72.1,68.8 69.3,66 69.3,65.5 69.6,65.2 70.8,65.2 73.2,67.6 73.2,68.4 72.7,68.8
Bottom Layer:
  region net 1.8V: 20.5,68.1 19.6,69 19.5,69 19.5,67.1
  region net 1.8V: 36,47.9 35.5,47.4 35.5,46 36,45.5 40.5,45.5 49.1,36.9 49.1,35 49.599,34.501 50.9,34.501 51.399,35 51.399,37.101 42.5,46 42.5,47 48.6,53.1 50.9,53.1 62,53.1 62.5,53.6 62.5,54.8 62,55.3 51.5,55.3 50.2,56.6 49.1,56.6 40.4,47.9

## Silkscreen, mask and mechanical layers (free items; w line width, h text height)
Top Solder:
  the board outline again, w3
Bottom Solder:
  the board outline again, w3
Border:
  lines w0.2: 9,9 91,9 91,91 9,91 9,9
  lines w3: 0,0 100,0 100,100 0,100 0,0